# Altium PCB Board.PcbDoc (part 1 of 2)
Units mm, origin at the board's own origin, x right, y up, seen from the top; angles counter-clockwise.
Board outline 370 x 200 mm, 2 copper layers (Top Layer, Bottom Layer); 313 components, 247 nets, 1088 pads, 8 vias.
Unrouted connection lines stored in the file: 699.
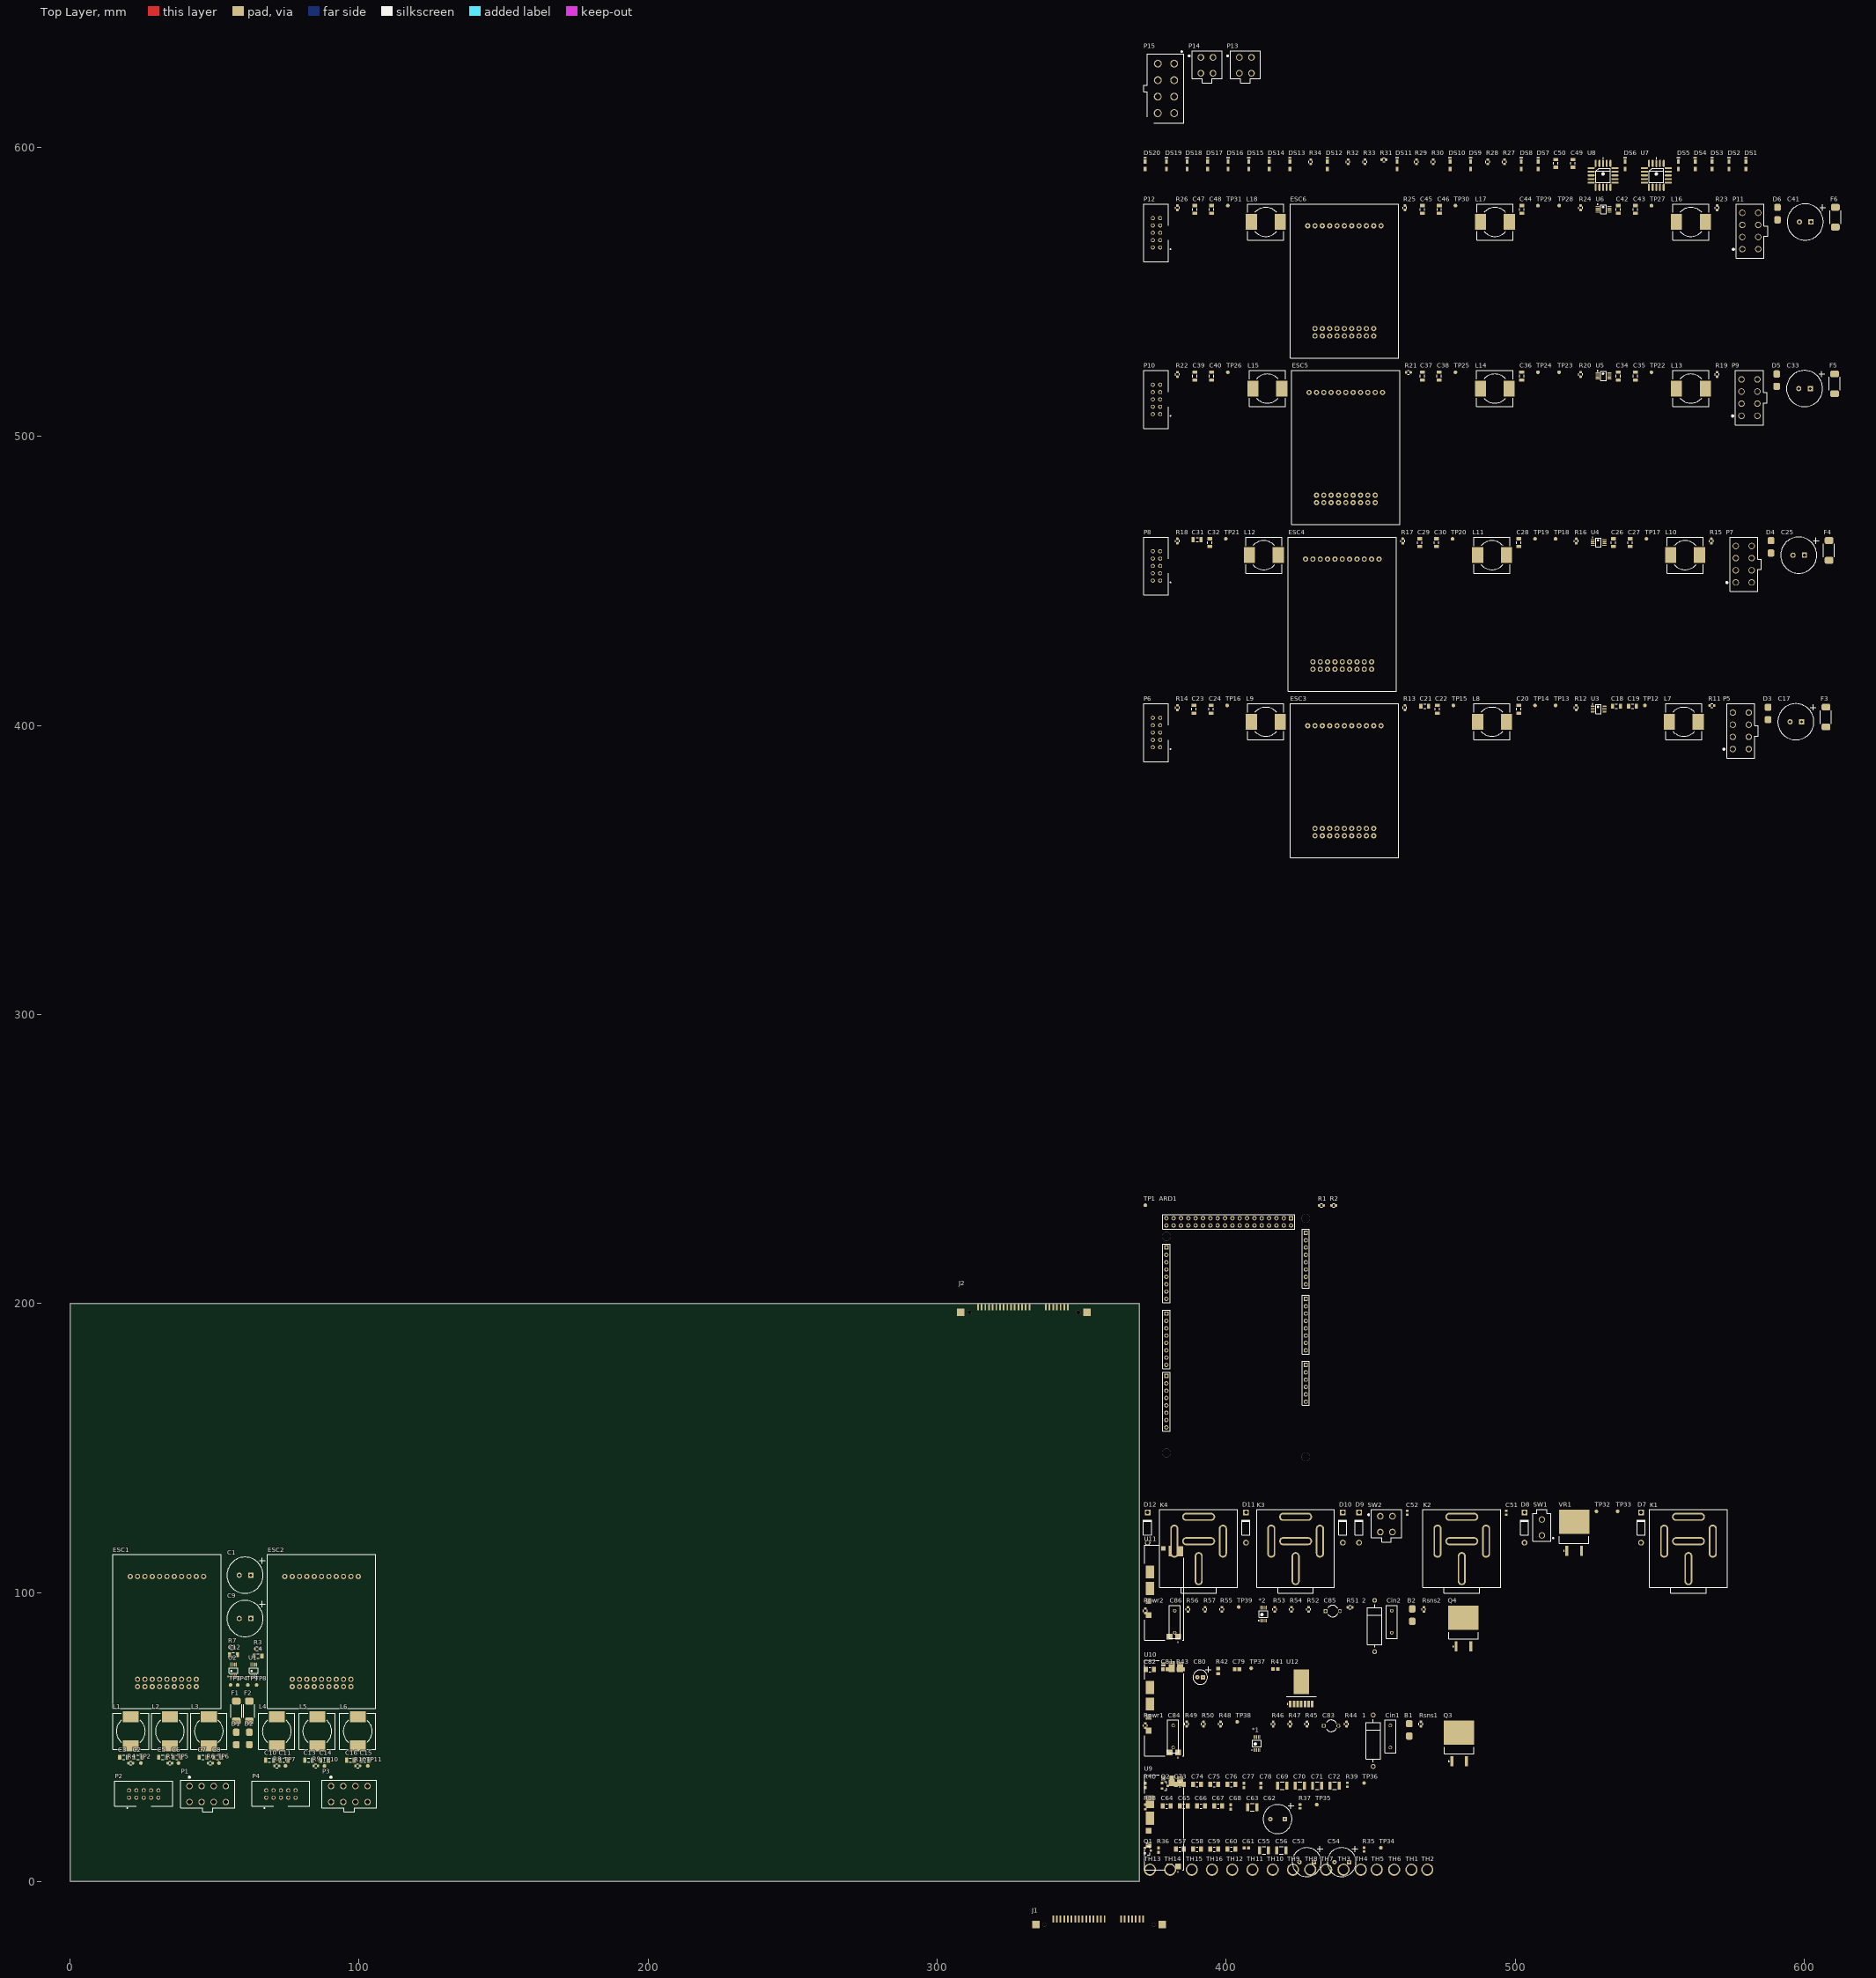
[diagram p0: Top Layer view]
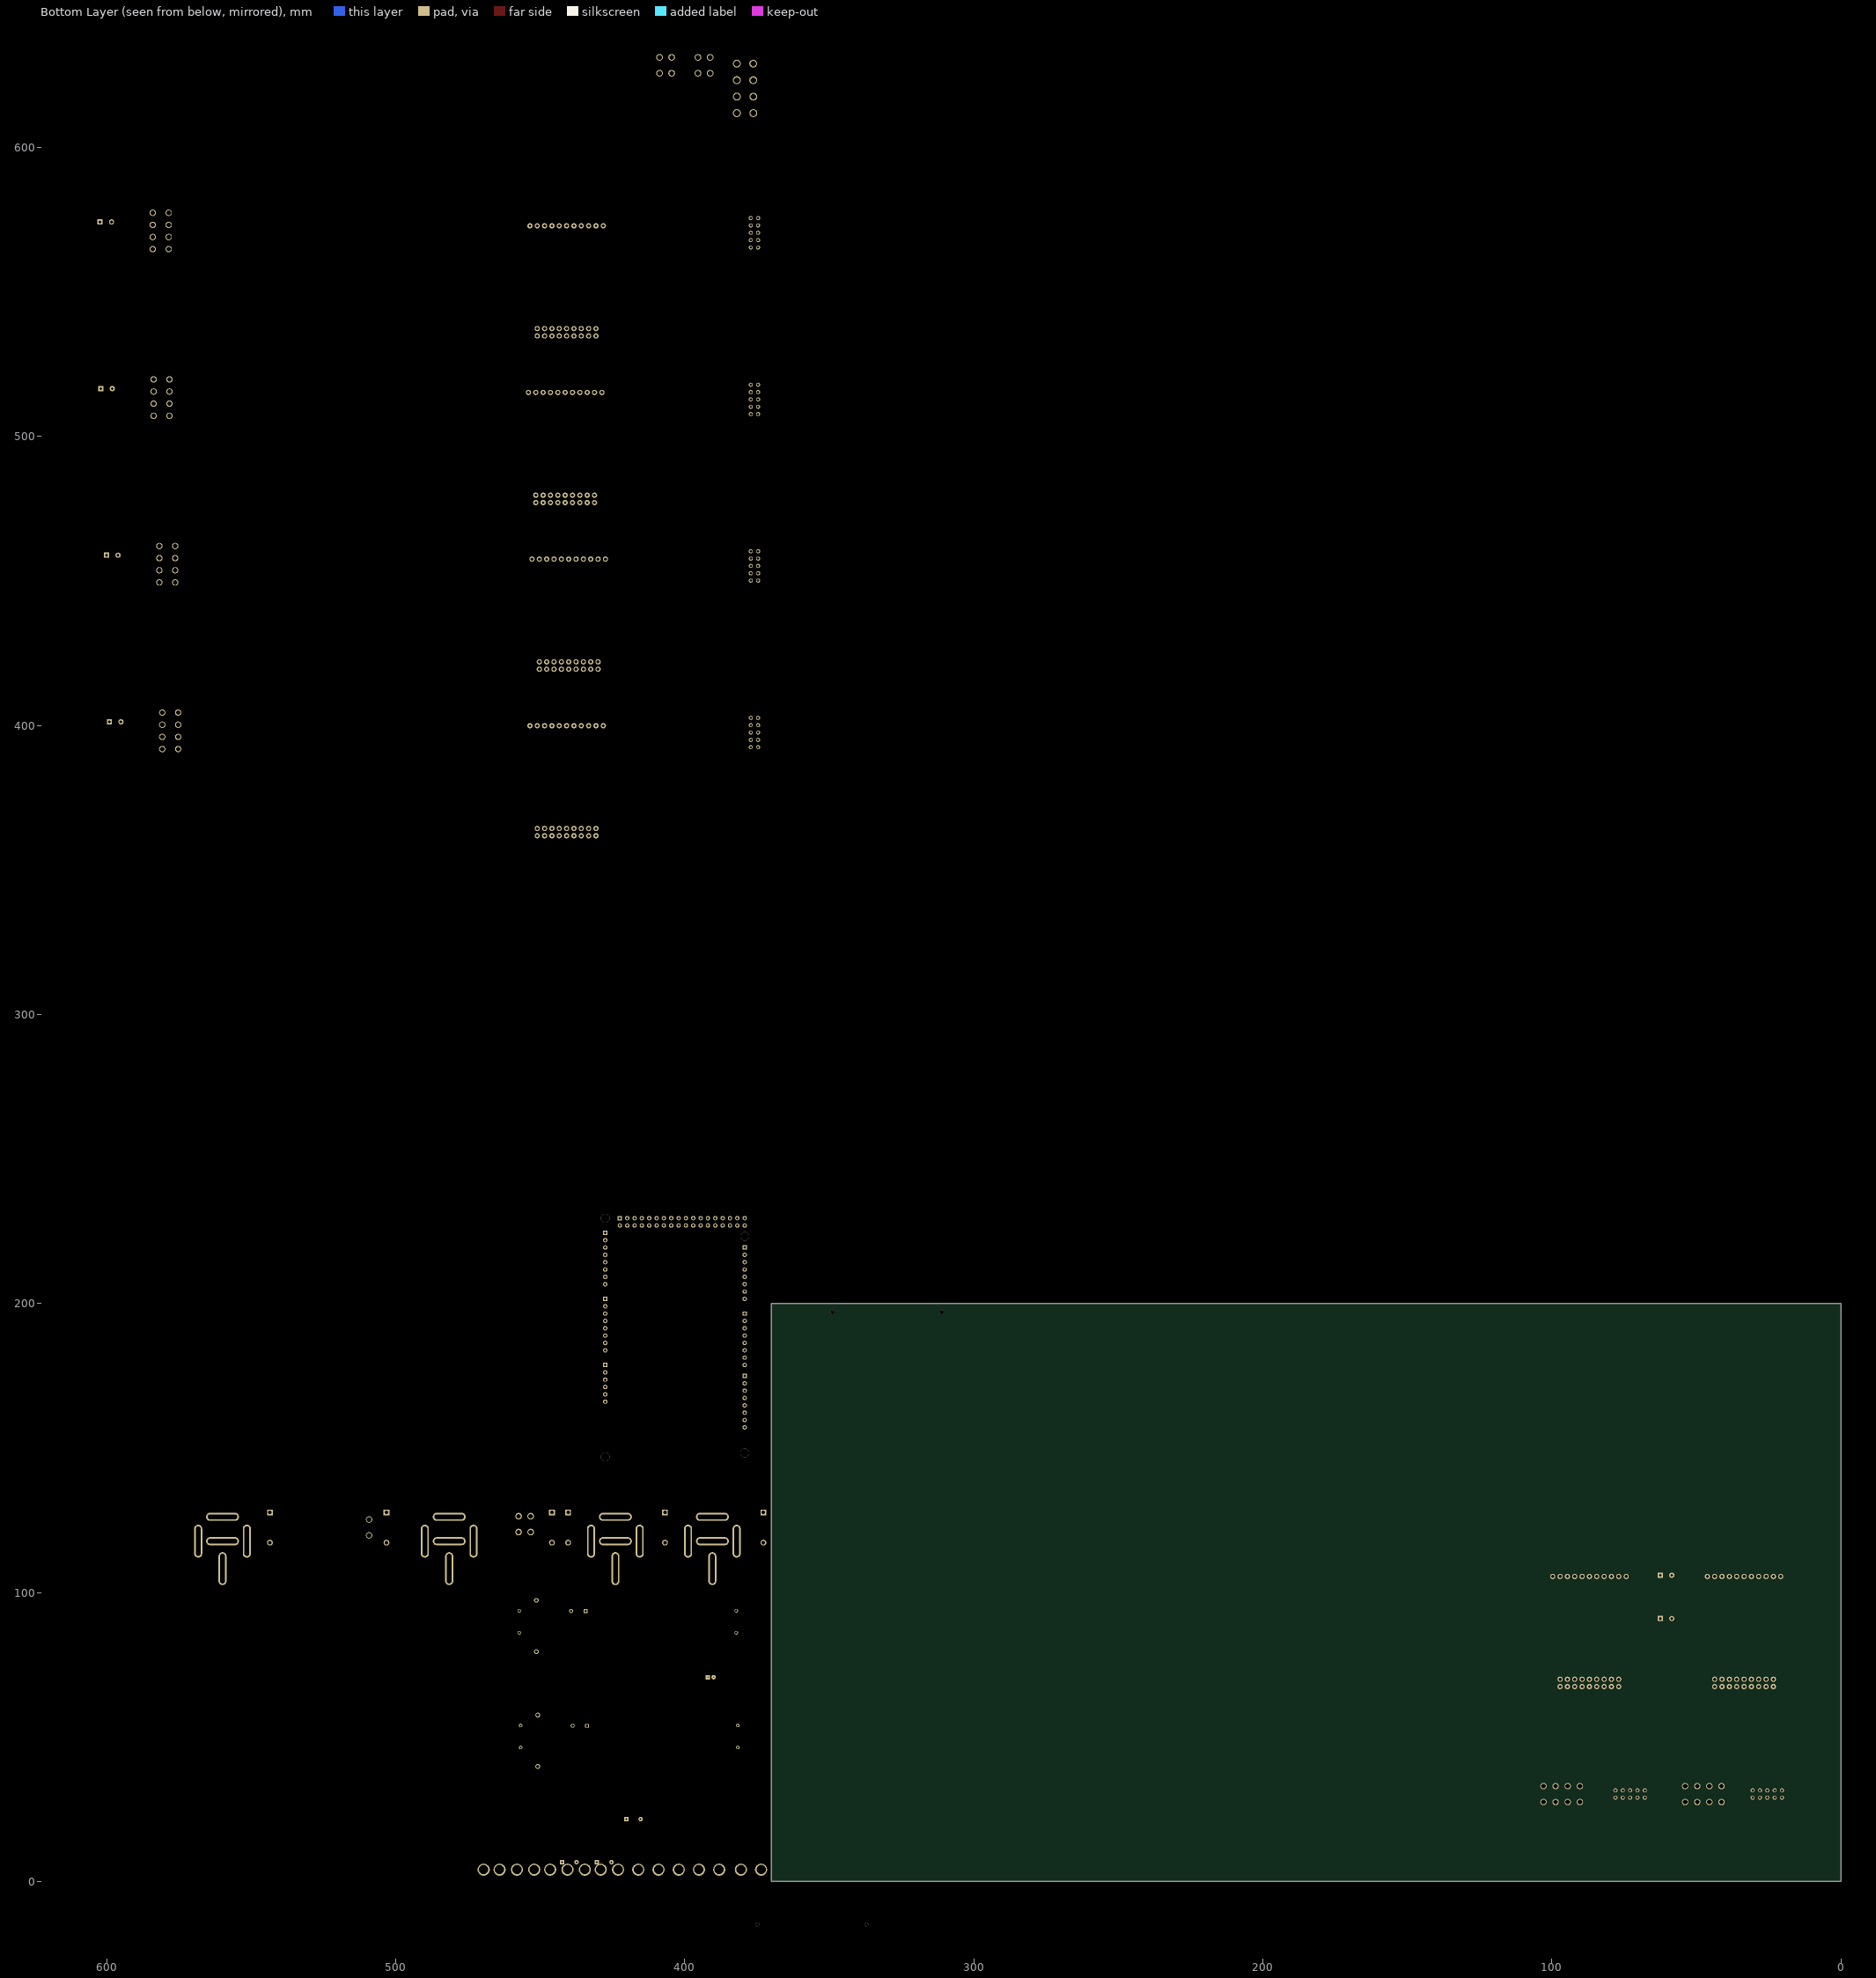
[diagram p1: Bottom Layer view, seen from below]

## Layer stack, top to bottom
Top Solder: solder mask 0.0102, Solder Resist, Dk 3.5
Top Layer: signal copper 0.0356
Dielectric 1: dielectric 0.32, FR-4, Dk 4.8
Bottom Layer: signal copper 0.0356
Bottom Solder: solder mask 0.0102, Solder Resist, Dk 3.5

## Board outline
0,0 370,0 370,200 0,200

## Design rules (kind name [scope] priority, off if disabled: settings)
Clearance [All] p1: gap=0.254 ignorepadtopadclearanceinfootprint=FALSE except(0: Arc-Hole Track-Hole SMDPad-Hole THPad-Hole Via-Hole Fill-Hole Poly-Hole Region-Hole Text-Hole)
PolygonConnect [All] p1: connectstyle=Relief reliefconductorwidth=0.254 reliefentries=4 polygonreliefangle="90 Angle" airgapwidth=0.254
RoomDefinition "SCH-10-Power Connectors" [InComponentClass('SCH-10-Power Connectors')] p1: confinementstyle=ConfineIn formatcopy=TRUE lockcomponents=FALSE outline 371.099,1.6 472.599,1.6 472.599,9.1 371.099,9.1
RoomDefinition "SCH-2-Main Controls" [InComponentClass('SCH-2-Main Controls')] p2: confinementstyle=ConfineIn formatcopy=TRUE lockcomponents=FALSE outline 371.12,132.758 438.899,132.758 438.899,237.413 371.12,237.413
RoomDefinition SCH-1-Relay_circuit [InComponentClass('SCH-1-Relay_circuit')] p3: confinementstyle=ConfineIn formatcopy=TRUE lockcomponents=FALSE outline 371.145,99.606 573.68,99.606 573.68,131.508 371.145,131.508
RoomDefinition 37V_efuse [InComponentClass('37V_efuse')] p4: confinementstyle=ConfineIn formatcopy=TRUE lockcomponents=FALSE outline 371.145,78.455 487.851,78.455 487.851,98.356 371.145,98.356
RoomDefinition 24V_board [InComponentClass('24V_board')] p5: confinementstyle=ConfineIn formatcopy=TRUE lockcomponents=FALSE outline 371.12,59.954 431.523,59.954 431.523,77.205 371.12,77.205
RoomDefinition 18V5_efuse [InComponentClass('18V5_efuse')] p6: confinementstyle=ConfineIn formatcopy=TRUE lockcomponents=FALSE outline 371.145,38.753 486.351,38.753 486.351,58.679 371.145,58.679
RoomDefinition 12V_board [InComponentClass('12V_board')] p7: confinementstyle=ConfineIn formatcopy=TRUE lockcomponents=FALSE outline 371.12,31.278 453.199,31.278 453.199,37.503 371.12,37.503
RoomDefinition 5V_board [InComponentClass('5V_board')] p8: confinementstyle=ConfineIn formatcopy=TRUE lockcomponents=FALSE outline 371.12,16.327 436.824,16.327 436.824,30.003 371.12,30.003
RoomDefinition 3V3_board [InComponentClass('3V3_board')] p9: confinementstyle=ConfineIn formatcopy=TRUE lockcomponents=FALSE outline 371.12,1.426 459,1.426 459,15.077 371.12,15.077
RoomDefinition "SCH-11-Out Going Connectors" [InComponentClass('SCH-11-Out Going Connectors')] p10: confinementstyle=ConfineIn formatcopy=TRUE lockcomponents=FALSE outline 371.145,608.331 412.172,608.331 412.172,636.307 371.145,636.307
RoomDefinition "SCH-9-Battery Voltage Indicators" [InComponentClass('SCH-9-Battery Voltage Indicators')] p11: confinementstyle=ConfineIn formatcopy=TRUE lockcomponents=FALSE outline 371.12,584.58 583.306,584.58 583.306,599.255 371.12,599.255
RoomDefinition SCH-4-ESC2 [InComponentClass('SCH-4-ESC2')] p12: confinementstyle=ConfineIn formatcopy=TRUE lockcomponents=FALSE outline 52.5,19.5 109.5,19.5 109.5,121 52.5,121
RoomDefinition SCH-3-ESC1 [InComponentClass('SCH-3-ESC1')] p13: confinementstyle=ConfineIn formatcopy=TRUE lockcomponents=FALSE outline 12.5,19.325 68.5,19.325 68.5,121.025 12.5,121.025
RoomDefinition SCH-8-ESC6 [InComponentClass('SCH-8-ESC6')] p14: confinementstyle=ConfineIn formatcopy=TRUE lockcomponents=FALSE outline 371.145,526.927 612.957,526.927 612.957,583.33 371.145,583.33
RoomDefinition SCH-7-ESC5 [InComponentClass('SCH-7-ESC5')] p15: confinementstyle=ConfineIn formatcopy=TRUE lockcomponents=FALSE outline 371.145,469.274 612.707,469.274 612.707,525.677 371.145,525.677
RoomDefinition SCH-6-ESC4 [InComponentClass('SCH-6-ESC4')] p16: confinementstyle=ConfineIn formatcopy=TRUE lockcomponents=FALSE outline 371.145,411.621 610.732,411.621 610.732,468.024 371.145,468.024
RoomDefinition SCH-5-ESC3 [InComponentClass('SCH-5-ESC3')] p17: confinementstyle=ConfineIn formatcopy=TRUE lockcomponents=FALSE outline 371.145,353.969 609.707,353.969 609.707,410.371 371.145,410.371
RoutingVias [All] p1: holewidth=0.711 width=1.27 viastyle="Through Hole" minholewidth=0.711 minwidth=1.27 maxholewidth=0.711 maxwidth=1.27
SolderMaskExpansion [All] p1: expansion=0.102 istentingtop=FALSE
Width [All] p1: maxlimit=0.254 minlimit=0.254 preferedwidth=0.254
30 further rules are at their usual default settings.

## Classes and differential pairs
component class "SCH-11-Out Going Connectors": J1 J2
component class SCH-8-ESC6: C41 C42 C43 C44 C45 C46 C47 C48 D6 ESC6 F6 L16 L17 L18 P11 P12 R23 R24 R25 R26 TP27 TP28 TP29 TP30 TP31 U6
component class SCH-7-ESC5: C33 C34 C35 C36 C37 C38 C39 C40 D5 ESC5 F5 L13 L14 L15 P9 P10 R19 R20 R21 R22 TP22 TP23 TP24 TP25 TP26 U5
component class SCH-6-ESC4: C25 C26 C27 C28 C29 C30 C31 C32 D4 ESC4 F4 L10 L11 L12 P7 P8 R15 R16 R17 R18 TP17 TP18 TP19 TP20 TP21 U4
component class SCH-5-ESC3: C17 C18 C19 C20 C21 C22 C23 C24 D3 ESC3 F3 L7 L8 L9 P5 P6 R11 R12 R13 R14 TP12 TP13 TP14 TP15 TP16 U3
component class SCH-4-ESC2: C9 C10 C11 C12 C13 C14 C15 C16 D2 ESC2 F2 L4 L5 L6 P3 P4 R7 R8 R9 R10 TP7 TP8 TP9 TP10 TP11 U2
component class SCH-3-ESC1: C1 C2 C3 C4 C5 C6 C7 C8 D1 ESC1 F1 L1 L2 L3 P1 P2 R3 R4 R5 R6 TP2 TP3 TP4 TP5 TP6 U1

## Components (designator, comment, footprint, x,y, rotation, side; value= is the part's Value field where it differs from the comment)
1 "D Zener" DIODE-0.7 450.874,48.704 r90 top
2 "D Zener" DIODE-0.7 451.374,88.406 r90 top
*1 "LM5069MM-2/NOPB" TSSOP50P490X110-10N 410.6,47.725 r90 top
*2 "LM5069MM-2/NOPB" TSSOP50P490X110-10N 412.897,92.506 r90 top
ARD1 "Arduino Mega" "Arduino Mega" 402.147,186.36 r90 top
B1 "TVS_DIODE" SMBJ54A-13-F 463.35,52.479 r90 top
B2 "TVS_DIODE" SMBJ54A-13-F 464.375,92.181 r90 top
C1 "Panasonic EEU-FC1J221S" "Panasonic EEU-FC1J221S" 60.5,106 r0 top value=220uF
C2 "Cap Semi" C1206 23.5,43 r180 top value=100pF
C3 "Cap Semi" C1206 18.5,43 r0 top value=100pF
C4 "Cap Semi" C1206 65,78 r180 top value=100pF
C5 "Cap Semi" C1206 32,43 r0 top value=100pF
C6 "Cap Semi" C1206 37,43 r180 top value=100pF
C7 "Cap Semi" C1206 46,43 r0 top value=100pF
C8 "Cap Semi" C1206 51,43 r180 top value=100pF
C9 "Panasonic EEU-FC1J221S" "Panasonic EEU-FC1J221S" 60.5,91 r0 top value=220uF
C10 "Cap Semi" C1206 69,42 r0 top value=100pF
C11 "Cap Semi" C1206 74,42 r180 top value=100pF
C12 "Cap Semi" C1206 56.5,78.5 r180 top value=100pF
C13 "Cap Semi" C1206 82.5,42 r0 top value=100pF
C14 "Cap Semi" C1206 88,42 r180 top value=100pF
C15 "Cap Semi" C1206 102,42 r180 top value=100pF
C16 "Cap Semi" C1206 97,42 r0 top value=100pF
C17 "Panasonic EEU-FC1J221S" "Panasonic EEU-FC1J221S" 597.106,401.296 r0 top value=220uF
C18 "Cap Semi" C1206 535.028,406.696 r0 top value=100pF
C19 "Cap Semi" C1206 540.604,406.696 r0 top value=100pF
C20 "Cap Semi" C1206 501.302,405.646 r90 top value=100pF
C21 "Cap Semi" C1206 468.7,406.696 r0 top value=100pF
C22 "Cap Semi" C1206 473.025,405.646 r90 top value=100pF
C23 "Cap Semi" C1206 388.896,405.646 r90 top value=100pF
C24 "Cap Semi" C1206 394.746,405.646 r90 top value=100pF
C25 "Panasonic EEU-FC1J221S" "Panasonic EEU-FC1J221S" 598.106,458.949 r0 top value=220uF
C26 "Cap Semi" C1206 533.978,463.299 r90 top value=100pF
C27 "Cap Semi" C1206 539.829,463.299 r90 top value=100pF
C28 "Cap Semi" C1206 501.302,463.299 r90 top value=100pF
C29 "Cap Semi" C1206 466.925,463.299 r90 top value=100pF
C30 "Cap Semi" C1206 472.75,463.299 r90 top value=100pF
C31 "Cap Semi" C1206 389.946,464.324 r0 top value=100pF
C32 "Cap Semi" C1206 394.271,463.299 r90 top value=100pF
C33 "Panasonic EEU-FC1J221S" "Panasonic EEU-FC1J221S" 600.106,516.601 r0 top value=220uF
C34 "Cap Semi" C1206 535.703,520.927 r90 top value=100pF
C35 "Cap Semi" C1206 541.554,520.927 r90 top value=100pF
C36 "Cap Semi" C1206 502.252,520.927 r90 top value=100pF
C37 "Cap Semi" C1206 467.9,520.927 r90 top value=100pF
C38 "Cap Semi" C1206 473.725,520.927 r90 top value=100pF
C39 "Cap Semi" C1206 389.146,520.927 r90 top value=100pF
C40 "Cap Semi" C1206 394.996,520.927 r90 top value=100pF
C41 "Panasonic EEU-FC1J221S" "Panasonic EEU-FC1J221S" 600.357,574.254 r0 top value=220uF
C42 "Cap Semi" C1206 535.728,578.579 r90 top value=100pF
C43 "Cap Semi" C1206 541.554,578.579 r90 top value=100pF
C44 "Cap Semi" C1206 502.277,578.579 r90 top value=100pF
C45 "Cap Semi" C1206 467.9,578.579 r90 top value=100pF
C46 "Cap Semi" C1206 473.75,578.579 r90 top value=100pF
C47 "Cap Semi" C1206 389.146,578.579 r90 top value=100pF
C48 "Cap Semi" C1206 394.996,578.579 r90 top value=100pF
C49 "Cap Semi" C1206 519.928,594.53 r90 top value=100pF
C50 "Cap Semi" C1206 514.077,594.53 r90 top value=100pF
C51 "Cap" 1608[0603] 496.976,127.557 r90 top value=100nF
C52 "Cap" 1608[0603] 462.675,127.557 r90 top value=22uF
C53 "330uF" "330uF throught hole" 427.873,6.702 r0 top
C54 "330uF" "330uF throught hole" 439.974,6.702 r0 top
C55 "22uF" "22uF Capacitor" 413.072,10.777 r0 top
C56 "22uF" "22uF Capacitor" 419.098,10.777 r0 top
C57 "10uf" "10uF capacitor LPB" 384.021,11.202 r0 top
C58 "10uf" "10uF capacitor LPB" 389.946,11.202 r0 top
C59 "10uf" "10uF capacitor LPB" 395.847,11.202 r0 top
C60 "10uf" "10uF capacitor LPB" 401.772,11.202 r0 top
C61 "0.01uF" "0.01uF capacitor" 406.922,11.627 r0 top
C62 "330uF" "330uF throught hole" 417.798,21.602 r0 top
C63 "22uF" "22uF Capacitor" 409.022,25.702 r0 top
C64 "10uf" "10uF capacitor LPB" 379.446,26.128 r0 top
C65 "10uf" "10uF capacitor LPB" 385.371,26.128 r0 top
C66 "10uf" "10uF capacitor LPB" 391.296,26.128 r0 top
C67 "10uf" "10uF capacitor LPB" 397.222,26.128 r0 top
C68 "0.01uF" "0.01uF capacitor" 401.572,25.777 r90 top
C69 "22uF" "22uF Capacitor" 419.423,33.203 r0 top
C70 "22uF" "22uF Capacitor" 425.448,33.203 r0 top
C71 "22uF" "22uF Capacitor" 431.473,33.203 r0 top
C72 "22uF" "22uF Capacitor" 437.499,33.203 r0 top
C73 "10uf" "10uF capacitor LPB" 384.021,33.628 r0 top
C74 "10uf" "10uF capacitor LPB" 389.946,33.628 r0 top
C75 "10uf" "10uF capacitor LPB" 395.847,33.628 r0 top
C76 "10uf" "10uF capacitor LPB" 401.772,33.628 r0 top
C77 "0.01uF" "0.01uF capacitor" 406.147,33.278 r90 top
C78 "0.01uF" "0.01uF capacitor" 411.997,33.278 r90 top
C79 "0.022uF" "0.022uF Ceramic" 403.772,73.48 r0 top
C80 "33uF" "33uF Through hole Radical" 391.021,70.705 r0 top
C81 "4700 pF" "4700uF 0805" 378.921,73.48 r0 top
C82 "10uf" "10uF capacitor LPB" 373.595,73.33 r0 top
C83 "Cap2" CAPR5-4X5 436.324,53.879 r0 top value=100pF
C84 "Cap" RAD-0.3 381.671,50.179 r90 top value=220nF
C85 "Cap2" CAPR5-4X5 436.849,93.581 r0 top value=100pF
C86 "Cap" RAD-0.3 382.196,89.881 r90 top value=220nF
Cin1 "Cin" RAD-0.3 456.8,50.179 r90 top value=100pF
Cin2 "Cin" RAD-0.3 457.3,89.881 r90 top value=100pF
D1 "TVS_DIODE" SMBJ54A-13-F 57.5,49.5 r270 top
D2 "TVS_DIODE" SMBJ54A-13-F 62,49.5 r270 top
D3 "TVS_DIODE" SMBJ54A-13-F 587.481,404.196 r90 top
D4 "TVS_DIODE" SMBJ54A-13-F 588.506,461.849 r90 top
D5 "TVS_DIODE" SMBJ54A-13-F 590.481,519.502 r90 top
D6 "TVS_DIODE" SMBJ54A-13-F 590.756,577.129 r90 top
D7 "Diode 1N4001" DO-41 543.554,122.482 r90 top
D8 "Diode 1N4001" DO-41 503.227,122.482 r90 top
D9 "Diode 1N4001" DO-41 445.974,122.482 r90 top
D10 "Diode 1N4001" DO-41 440.374,122.482 r90 top
D11 "Diode 1N4001" DO-41 406.847,122.482 r90 top
D12 "Diode 1N4001" DO-41 372.795,122.482 r90 top
DS1 "LTST-S220KGKT" LTST-S220KGKT_V 579.806,593.88 r90 top
DS2 "LTST-S220KGKT" LTST-S220KGKT_V 573.98,593.88 r90 top
DS3 "LTST-S220KGKT" LTST-S220KGKT_V 568.13,593.88 r90 top
DS4 "LTST-S220KGKT" LTST-S220KGKT_V 562.28,593.88 r90 top
DS5 "LTST-S220KGKT" LTST-S220KGKT_V 556.454,593.88 r90 top
DS6 "LTST-S220KGKT" LTST-S220KGKT_V 538.028,593.88 r90 top
DS7 "LTST-S220KGKT" LTST-S220KGKT_V 507.927,593.88 r90 top
DS8 "LTST-S220KGKT" LTST-S220KGKT_V 502.102,593.88 r90 top
DS9 "LTST-S220KGKT" LTST-S220KGKT_V 484.551,593.88 r90 top
DS10 "LTST-S220KGKT" LTST-S220KGKT_V 477.451,593.88 r90 top
DS11 "LTST-S220KGKT" LTST-S220KGKT_V 459.125,593.88 r90 top
DS12 "LTST-S220KGKT" LTST-S220KGKT_V 434.973,593.88 r90 top
DS13 "LTST-S220KGKT" LTST-S220KGKT_V 422.023,593.88 r90 top
DS14 "LTST-S220KGKT" LTST-S220KGKT_V 414.897,593.88 r90 top
DS15 "LTST-S220KGKT" LTST-S220KGKT_V 407.797,593.88 r90 top
DS16 "LTST-S220KGKT" LTST-S220KGKT_V 400.672,593.88 r90 top
DS17 "LTST-S220KGKT" LTST-S220KGKT_V 393.571,593.88 r90 top
DS18 "LTST-S220KGKT" LTST-S220KGKT_V 386.471,593.88 r90 top
DS19 "LTST-S220KGKT" LTST-S220KGKT_V 379.346,593.88 r90 top
DS20 "LTST-S220KGKT" LTST-S220KGKT_V 371.97,593.88 r90 top
ESC1 "ESCON 50/8 HE" "ESCON 50/8 HE" 33.5,86.5 r90 top
ESC2 "ESCON 50/8 HE" "ESCON 50/8 HE" 87,86.5 r90 top
ESC3 "ESCON 50/8 HE" "ESCON 50/8 HE" 440.899,380.895 r90 top
ESC4 "ESCON 50/8 HE" "ESCON 50/8 HE" 440.174,438.548 r90 top
ESC5 "ESCON 50/8 HE" "ESCON 50/8 HE" 441.399,496.2 r90 top
ESC6 "ESCON 50/8 HE" "ESCON 50/8 HE" 440.899,553.853 r90 top
F1 "Fuse 2" 0157010.DR 57.5,59 r90 top
F2 "Fuse 2" 0157010.DR 62,59 r90 top
F3 "Fuse 2" 0157010.DR 607.532,402.946 r90 top
F4 "Fuse 2" 0157010.DR 608.557,460.599 r90 top
F5 "Fuse 2" 0157010.DR 610.532,518.252 r90 top
F6 "Fuse 2" 0157010.DR 610.782,575.904 r90 top
J1 "SATA 1" "SATA Female" 356.03,-14.825 r0 top
J2 "SATA 2" "SATA Female" 330,197 r0 top
K1 "Relay" "Relay RC-700112-NN" 559.955,115.232 r0 top
K2 "Relay" "Relay RC-700112-NN" 481.526,115.232 r0 top
K3 "Relay" "Relay RC-700112-NN" 424.023,115.232 r0 top
K4 "Relay" "Relay RC-700112-NN" 390.471,115.232 r0 top
L1 "DR127-4R7-R" DR127-4R7-R 21,52 r270 top value=4.7uH
L2 "DR127-4R7-R" DR127-4R7-R 34.5,52 r270 top value=4.7uH
L3 "DR127-4R7-R" DR127-4R7-R 48,52 r270 top value=4.7uH
L4 "DR127-4R7-R" DR127-4R7-R 71.5,52 r270 top value=4.7uH
L5 "DR127-4R7-R" DR127-4R7-R 85.5,52 r270 top value=4.7uH
L6 "DR127-4R7-R" DR127-4R7-R 99.5,52 r270 top value=4.7uH
L7 "DR127-4R7-R" DR127-4R7-R 558.304,401.296 r0 top value=4.7uH
L8 "DR127-4R7-R" DR127-4R7-R 492.001,401.296 r0 top value=4.7uH
L9 "DR127-4R7-R" DR127-4R7-R 413.722,401.296 r0 top value=4.7uH
L10 "DR127-4R7-R" DR127-4R7-R 558.779,458.949 r0 top value=4.7uH
L11 "DR127-4R7-R" DR127-4R7-R 492.001,458.949 r0 top value=4.7uH
L12 "DR127-4R7-R" DR127-4R7-R 412.997,458.949 r0 top value=4.7uH
L13 "DR127-4R7-R" DR127-4R7-R 560.78,516.601 r0 top value=4.7uH
L14 "DR127-4R7-R" DR127-4R7-R 492.951,516.601 r0 top value=4.7uH
L15 "DR127-4R7-R" DR127-4R7-R 414.222,516.601 r0 top value=4.7uH
L16 "DR127-4R7-R" DR127-4R7-R 560.78,574.254 r0 top value=4.7uH
L17 "DR127-4R7-R" DR127-4R7-R 492.976,574.254 r0 top value=4.7uH
L18 "DR127-4R7-R" DR127-4R7-R 413.722,574.254 r0 top value=4.7uH
P1 "0039281083" "Molex Mini-Fit Jr 0039281083" 47.6,30.25 r0 top
P2 "Header_10_Pos_Ribbon Male" 3M_2510-6002UB 25.46,30.27 r0 top
P3 "0039281083" "Molex Mini-Fit Jr 0039281083" 96.6,30.25 r0 top
P4 "Header_10_Pos_Ribbon Male" 3M_2510-6002UB 72.92,30.27 r0 top
P5 "0039281083" "Molex Mini-Fit Jr 0039281083" 578.055,398.171 r90 top
P6 "Header_10_Pos_Ribbon Male" 3M_2510-6002UB 375.896,397.571 r90 top
P7 "0039281083" "Molex Mini-Fit Jr 0039281083" 579.08,455.823 r90 top
P8 "Header_10_Pos_Ribbon Male" 3M_2510-6002UB 375.896,455.223 r90 top
P9 "0039281083" "Molex Mini-Fit Jr 0039281083" 581.056,513.476 r90 top
P10 "Header_10_Pos_Ribbon Male" 3M_2510-6002UB 375.896,512.851 r90 top
P11 "0039281083" "Molex Mini-Fit Jr 0039281083" 581.331,571.129 r90 top
P12 "Header_10_Pos_Ribbon Male" 3M_2510-6002UB 375.896,570.504 r90 top
P13 "Mini-Fit Jr 4 Pos" "MOLEX 0039281043" 404.547,631.207 r0 top
P14 "Mini-Fit Jr 4 Pos" "MOLEX 0039281043" 391.246,631.207 r0 top
P15 "Mini-Fit Jr 8 Pos RA" "MOLEX 172065-0208" 377.771,619.231 r90 top
Q1 "2N7002-7-F" FP-SOT23-MFG 372.92,10.702 r0 top
Q2 "2N7002-7-F" FP-SOT23-MFG 378.771,33.128 r0 top
Q3 "PSMN4R8-100BSEJ" DPAK254P1420X457-3N 480.601,47.704 r90 top
Q4 "PSMN4R8-100BSEJ" DPAK254P1420X457-3N 482.101,87.406 r90 top
R1 "Res1" RESC1608X06N_0603 432.973,233.963 r0 top value=10k
R2 "Res1" RESC1608X06N_0603 437.199,233.963 r0 top value=10k
R3 "Res1" RESC1608X06N_0603 64.725,80.5 r180 top value=1K
R4 "Res1" RESC1608X06N_0603 21,41 r0 top value=1K
R5 "Res1" RESC1608X06N_0603 34.5,41 r0 top value=1K
R6 "Res1" RESC1608X06N_0603 48.5,41 r0 top value=1K
R7 "Res1" RESC1608X06N_0603 56,81 r180 top value=1K
R8 "Res1" RESC1608X06N_0603 71.5,40 r0 top value=1K
R9 "Res1" RESC1608X06N_0603 85,40 r0 top value=1K
R10 "Res1" RESC1608X06N_0603 99.5,40 r180 top value=1K
R11 "Res1" RESC1608X06N_0603 568.08,406.921 r0 top value=1K
R12 "Res1" RESC1608X06N_0603 521.128,406.196 r90 top value=1K
R13 "Res1" RESC1608X06N_0603 461.825,406.196 r90 top value=1K
R14 "Res1" RESC1608X06N_0603 383.096,406.196 r90 top value=1K
R15 "Res1" RESC1608X06N_0603 567.88,463.849 r90 top value=1K
R16 "Res1" RESC1608X06N_0603 521.128,463.849 r90 top value=1K
R17 "Res1" RESC1608X06N_0603 461.1,463.849 r90 top value=1K
R18 "Res1" RESC1608X06N_0603 383.096,463.849 r90 top value=1K
R19 "Res1" RESC1608X06N_0603 569.855,521.502 r90 top value=1K
R20 "Res1" RESC1608X06N_0603 522.603,521.502 r90 top value=1K
R21 "Res1" RESC1608X06N_0603 463.05,522.202 r0 top value=1K
R22 "Res1" RESC1608X06N_0603 383.096,521.502 r90 top value=1K
R23 "Res1" RESC1608X06N_0603 569.88,579.155 r90 top value=1K
R24 "Res1" RESC1608X06N_0603 522.628,579.155 r90 top value=1K
R25 "Res1" RESC1608X06N_0603 461.825,579.155 r90 top value=1K
R26 "Res1" RESC1608X06N_0603 383.096,579.155 r90 top value=1K
R27 "Res1" RESC1608X06N_0603 496.326,595.08 r90 top value=1K
R28 "Res1" RESC1608X06N_0603 490.476,595.08 r90 top value=1K
R29 "Res1" RESC1608X06N_0603 465.825,595.08 r90 top value=1K
R30 "Res1" RESC1608X06N_0603 471.675,595.08 r90 top value=1K
R31 "Res1" RESC1608X06N_0603 454.574,595.805 r0 top value=1K
R32 "Res1" RESC1608X06N_0603 442.174,595.08 r90 top value=1K
R33 "Res1" RESC1608X06N_0603 448.024,595.08 r90 top value=1K
R34 "Res1" RESC1608X06N_0603 429.223,595.08 r90 top value=1K
R35 "CRCW06030000Z0EA" RESC1609X50X30NL8T20 447.724,11.052 r90 top
R36 "26.7KR" "26.7KR Resistor" 376.621,10.852 r90 top
R37 "CRCW06030000Z0EA" RESC1609X50X30NL8T20 425.548,25.978 r90 top
R38 "16.2 KOhm" "16.2 KOhm Resistor" 371.995,25.827 r90 top
R39 "CRCW06030000Z0EA" RESC1609X50X30NL8T20 441.899,33.478 r90 top
R40 "6.19 KOhm" "6.19KOhm Resistor" 372.045,33.278 r90 top
R41 "34KOhm" "34 KOhm Resistor ERA-6A" 416.998,73.53 r0 top
R42 "1.18 KOhm" "34 KOhm Resistor ERA-6A" 397.197,72.78 r90 top
R43 "499 KOhm" "499KOhm RG2012" 384.271,73.48 r0 top
R44 "RCL2" RESC1608X06N_0603 441.674,54.504 r90 top value=1K
R45 "RCL1" RESC1608X06N_0603 427.973,54.504 r90 top value=1K
R46 "R1" RESC1608X06N_0603 416.273,54.504 r90 top value=1K
R47 "R3" RESC1608X06N_0603 422.123,54.504 r90 top value=1K
R48 "R" RESC1608X06N_0603 398.022,54.504 r90 top value=1K
R49 "R2" RESC1608X06N_0603 386.321,54.504 r90 top value=1K
R50 "R4" RESC1608X06N_0603 392.171,54.504 r90 top value=1K
R51 "RCL2" RESC1608X06N_0603 442.874,94.906 r0 top value=1K
R52 "RCL1" RESC1608X06N_0603 428.498,94.181 r90 top value=1K
R53 "R1" RESC1608X06N_0603 416.773,94.181 r90 top value=1K
R54 "R3" RESC1608X06N_0603 422.623,94.181 r90 top value=1K
R55 "R" RESC1608X06N_0603 398.522,94.181 r90 top value=1K
R56 "R2" RESC1608X06N_0603 386.821,94.181 r90 top value=1K
R57 "R4" RESC1608X06N_0603 392.671,94.181 r90 top value=1K
Rpwr1 "Rpwr" RESC1608X06N_0603 372.07,53.979 r90 top value=1K
Rpwr2 "Rpwr" RESC1608X06N_0603 372.07,93.681 r90 top value=1K
Rsns1 "Rsns" RESC1608X06N_0603 467.375,54.504 r90 top value=1K
Rsns2 "Rsns" RESC1608X06N_0603 468.375,94.181 r90 top value=1K
SW1 "Key_Switch" MOLEX_0039293026 509.227,122.507 r90 top
SW2 "NO-NC ESD with light" "MOLEX 0039281043" 453.324,126.407 r0 top
TH1 "12AWG_TH" m3screw 464.099,4.1 r0 top
TH2 "12AWG_TH" m3screw 469.599,4.1 r0 top
TH3 "12AWG_TH" m3screw 440.599,4.1 r0 top
TH4 "12AWG_TH" m3screw 446.599,4.1 r0 top
TH5 "10AWG_TH" m3screw 452.099,4.1 r0 top
TH6 "10AWG_TH" m3screw 458.099,4.1 r0 top
TH7 "10AWG_TH" m3screw 434.599,4.1 r0 top
TH8 "10AWG_TH" m3screw 429.099,4.1 r0 top
TH9 "10AWG_TH" m3screw 423.099,4.1 r0 top
TH10 "10AWG_TH" m3screw 416.099,4.1 r0 top
TH11 "10AWG_TH" m3screw 409.099,4.1 r0 top
TH12 "10AWG_TH" m3screw 402.099,4.1 r0 top
TH13 "10AWG_TH" m3screw 373.599,4.1 r0 top
TH14 "10AWG_TH" m3screw 380.599,4.1 r0 top
TH15 "10AWG_TH" m3screw 388.099,4.1 r0 top
TH16 "10AWG_TH" m3screw 395.099,4.1 r0 top
TP1 "TestPt" 50_MIL_PAD 372.02,234.013 r90 top
TP2 "TestPt" 50_MIL_PAD 24.5,41 r90 top
TP3 "TestPt" 50_MIL_PAD 55.5,68 r90 top
TP4 "TestPt" 50_MIL_PAD 58,68 r90 top
TP5 "TestPt" 50_MIL_PAD 37.5,41 r90 top
TP6 "TestPt" 50_MIL_PAD 51.5,41 r90 top
TP7 "TestPt" 50_MIL_PAD 74.5,40 r90 top
TP8 "TestPt" 50_MIL_PAD 64.5,68 r90 top
TP9 "TestPt" 50_MIL_PAD 61.5,68 r90 top
TP10 "TestPt" 50_MIL_PAD 88,40 r90 top
TP11 "TestPt" 50_MIL_PAD 103,40 r90 top
TP12 "TestPt" 50_MIL_PAD 544.904,406.971 r90 top
TP13 "TestPt" 50_MIL_PAD 513.977,406.971 r90 top
TP14 "TestPt" 50_MIL_PAD 506.877,406.971 r90 top
TP15 "TestPt" 50_MIL_PAD 478.601,406.971 r90 top
TP16 "TestPt" 50_MIL_PAD 400.322,406.971 r90 top
TP17 "TestPt" 50_MIL_PAD 545.404,464.599 r90 top
TP18 "TestPt" 50_MIL_PAD 513.977,464.599 r90 top
TP19 "TestPt" 50_MIL_PAD 506.877,464.599 r90 top
TP20 "TestPt" 50_MIL_PAD 478.351,464.599 r90 top
TP21 "TestPt" 50_MIL_PAD 399.847,464.599 r90 top
TP22 "TestPt" 50_MIL_PAD 547.129,522.252 r90 top
TP23 "TestPt" 50_MIL_PAD 515.202,522.252 r90 top
TP24 "TestPt" 50_MIL_PAD 507.852,522.252 r90 top
TP25 "TestPt" 50_MIL_PAD 479.326,522.252 r90 top
TP26 "TestPt" 50_MIL_PAD 400.572,522.252 r90 top
TP27 "TestPt" 50_MIL_PAD 547.154,579.905 r90 top
TP28 "TestPt" 50_MIL_PAD 515.227,579.905 r90 top
TP29 "TestPt" 50_MIL_PAD 507.852,579.905 r90 top
TP30 "TestPt" 50_MIL_PAD 479.326,579.905 r90 top
TP31 "TestPt" 50_MIL_PAD 400.572,579.905 r90 top
TP32 "TestPt" 50_MIL_PAD 528.078,128.107 r90 top
TP33 "TestPt" 50_MIL_PAD 535.428,128.107 r90 top
TP34 "TestPt" 50_MIL_PAD 453.524,11.677 r90 top
TP35 "TestPt" 50_MIL_PAD 431.348,26.603 r90 top
TP36 "TestPt" 50_MIL_PAD 447.724,34.078 r90 top
TP37 "TestPt" 50_MIL_PAD 408.647,73.78 r90 top
TP38 "TestPt" 50_MIL_PAD 403.822,55.254 r90 top
TP39 "TestPt" 50_MIL_PAD 404.347,94.956 r90 top
U1 "DAC121C085" MUA08A_L 63.5,73 r90 top
U2 "DAC121C085" MUA08A_L 56.5,73 r90 top
U3 "DAC121C085" MUA08A_L 528.828,405.696 r0 top
U4 "DAC121C085" MUA08A_L 528.828,463.349 r0 top
U5 "DAC121C085" MUA08A_L 530.553,520.977 r0 top
U6 "DAC121C085" MUA08A_L 530.578,578.629 r0 top
U7 "LM3914VX/NOPB" PLCC127P990X990X457-20N 548.829,590.38 r0 top
U8 "LM3914VX/NOPB" PLCC127P990X990X457-20N 530.403,590.38 r0 top
U9 "APXW012A0X3-SRZ" APXW012A0X3SRZ 378.599,20.1 r90 top
U10 "APXW012A0X3-SRZ_1" APXW012A0X3SRZ 378.599,59.6 r90 top
U11 "APXW012A0X3-SRZ_1" APXW012A0X3SRZ 378.599,99.6 r90 top
U12 "LMZ14203HTZX/NOPB" NDW0007A_V 425.998,66.779 r90 top
VR1 "Volt Reg" DPAK254P1420X457-3N 520.428,120.557 r90 top

## Footprints (in the part's own frame and the unit in brackets; to place one, negate y for a bottom-side part, rotate by r counter-clockwise, add the part's x,y. Pads: shape width x height; smd on the part's side, far side on the other; paste and mask are expansions set on the pad)
"0.01uF capacitor" [mm] "Chip Capacitor, 2-Leads, Body 1,60x0,80mm, IPC Medium Density"
  rect 1.05x1 smd: 1(-0.75,0) 2(0.75,0)
  body extent -0.88,-0.48 0.87,0.47, height 0.87
"0.022uF Ceramic" [mm] "Chip Capacitor, 2-Leads, Body 2,00x1,25mm, IPC Medium Density"
  rect 1.3x1.45 smd: 1(-0.8,0) 2(0.8,0)
  body extent -1.1,-0.72 1.1,0.72, height 0.88
3M_2510-6002UB [mm] "Connector Header Through Hole 10 position 0.100\" (2.54mm)"
  round 1.4 hole 0.889: 1(-5.08,-1.27) 2(-5.08,1.27) 3(-2.54,-1.27) 4(-2.54,1.27) 5(0,-1.27) 6(0,1.27) 7(2.54,-1.27) 8(2.54,1.27) 9(5.08,-1.27) 10(5.08,1.27)
  silkscreen extent -10.01,-4.89 9.98,4.47, body extent -10.01,-4.17 10.01,4.47, height 9.4
"6.19KOhm Resistor" [mm] "Chip Resistor, 2-Leads, Body 1,60x0,80mm, IPC Medium Density"
  rect 1.05x1 smd: 1(-0.725,0) 2(0.725,0)
  body extent -0.9,-0.5 0.9,0.5, height 0.55
"10uF capacitor LPB" [mm] "Chip Capacitor, 2-Leads, Body 3,20x1,60mm, IPC Medium Density"
  rect 1.35x1.8 smd: 1(-1.375,0) 2(1.375,0)
  silkscreen extent -0.3,-0.8 0.3,0.8, body extent -1.7,-0.9 1.7,0.9, height 1.8
"16.2 KOhm Resistor" [mm] "Chip Resistor, 2-Leads, Body 1,60x0,80mm, IPC Medium Density"
  rect 0.85x0.9 smd: 1(-0.775,0) 2(0.775,0)
  body extent -0.85,-0.45 0.85,0.45, height 0.55
"22uF Capacitor" [mm] "Chip Capacitor, 2-Leads, Body 3,20x2,50mm, IPC Medium Density"
  rect 1.05x2.7 smd: 1(-1.575,0) 2(1.575,0)
  silkscreen extent -0.65,-1.25 0.65,1.25, body extent -1.75,-1.35 1.75,1.35, height 2.7
"26.7KR Resistor" [mm] "Chip Resistor, 2-Leads, Body 1,60x0,80mm, IPC Medium Density"
  rect 1.05x1 smd: 1(-0.725,0) 2(0.725,0)
  body extent -0.9,-0.5 0.9,0.5, height 0.55
"33uF Through hole Radical" [mm]
  rect 1.524x1.524 hole 0.5: 1(1,0)
  round 1.524 hole 0.5: 2(-1,0)
  silkscreen extent -2.5,-2.5 3.79,3.67
"34 KOhm Resistor ERA-6A" [mm] "Chip Resistor, 2-Leads, Body 2,00x1,25mm, IPC Medium Density"
  rect 1.2x1.35 smd: 1(-0.85,0) 2(0.85,0)
  body extent -1.1,-0.67 1.1,0.67, height 0.6
50_MIL_PAD [mm]
  round 1.27 smd: 1(0,0)
"330uF throught hole" [mm]
  rect 1.524x1.524 hole 0.6: 1(2.5,0)
  round 1.524 hole 0.6: 2(-2.5,0)
  silkscreen extent -5,-5 5.57,5.57
"499KOhm RG2012" [mm] "Chip Resistor, 2-Leads, Body 2,00x1,25mm, IPC Medium Density"
  rect 1.15x1.45 smd: 1(-0.875,0) 2(0.875,0)
  body extent -1.1,-0.72 1.1,0.72, height 0.5
1608[0603] [mm] "Chip Capacitor, Body 1.6x0.8mm, IPC High Density"
  rect 0.8x0.9 smd: 1(-0.7,0) 2(0.7,0)
  body extent -0.87,-0.48 0.87,0.48, height 1.3
"4700uF 0805" [mm] "Chip Capacitor, 2-Leads, Body 2,00x1,25mm, IPC Medium Density"
  rect 1.3x1.45 smd: 1(-0.8,0) 2(0.8,0)
  body extent -1.1,-0.72 1.1,0.72, height 0.88
0157010.DR [mm]
  rrect50% 2.4x3 smd: 1(3.43,0) 2(-3.43,0)
  silkscreen extent -2.29,-1.91 2.29,1.91, body extent -3.29,-1.84 3.29,1.84, height 3.9
APXW012A0X3SRZ [mm]
  rect 2.03x2.03 smd: 1(-14.89,-4.82) 7(-2.57,5.46) 8(-7.4,5.46) 9(-14.89,-1.78)
  rect 3.43x2.16 smd: 2(14.64,-5.4)
  rect 3.68x2.03 smd: 3(14.78,-2.54)
  rect 1.52x1.52 smd: 4(15.59,0.26)
  rect 4.45x2.92 smd: 5(7.53,5.02) 6(1.81,5.02)
  silkscreen extent -16.86,-6.73 16.86,6.73, body extent -16.16,-6.73 16.86,6.73, height 10.1
"Arduino Mega" [mm] "Arduino Mega 2560"
  rect 1.5x1.5 hole 0.9: 0(10.16,22.86) 8(-11.43,22.86) 21(33.02,22.86) 59(-7.62,-25.4) 67(15.24,-25.4) 75(38.1,-25.4) 79(43.18,-20.32)
  round 1.5 hole 0.9: 1(7.62,22.86) 2(5.08,22.86) 3(2.54,22.86) 4(0,22.86) 5(-2.54,22.86) 6(-5.08,22.86) 7(-7.62,22.86) 9(-13.97,22.86) 10(-16.51,22.86) 11(-19.05,22.86) 12(-21.59,22.86) 13(-24.13,22.86) 14(15.24,22.86) 15(17.78,22.86) 16(20.32,22.86) 17(22.86,22.86) 18(25.4,22.86) 19(27.94,22.86) 20(30.48,22.86) 22(40.64,20.32) 23(43.18,20.32) 24(40.64,17.78) 25(43.18,17.78) 26(40.64,15.24) 27(43.18,15.24) 28(40.64,12.7) 29(43.18,12.7) 30(40.64,10.16) 31(43.18,10.16) 32(40.64,7.62) 33(43.18,7.62) 34(40.64,5.08) 35(43.18,5.08) 36(40.64,2.54) 37(43.18,2.54) 38(40.64,0) 39(43.18,0) 40(40.64,-2.54) 41(43.18,-2.54) 42(40.64,-5.08) 43(43.18,-5.08) 44(40.64,-7.62) 45(43.18,-7.62) 46(40.64,-10.16) 47(43.18,-10.16) 48(40.64,-12.7) 49(43.18,-12.7) 50(40.64,-15.24) 51(43.18,-15.24) 52(40.64,-17.78) 53(43.18,-17.78) 54(-20.32,-25.4) 55(-17.78,-25.4) 56(-15.24,-25.4) 57(-12.7,-25.4) 58(-10.16,-25.4) 60(-2.54,-25.4) 61(0,-25.4) 62(2.54,-25.4) 63(5.08,-25.4) 64(7.62,-25.4) 65(10.16,-25.4) 66(12.7,-25.4) 68(20.32,-25.4) 69(22.86,-25.4) 70(25.4,-25.4) 71(27.94,-25.4) 72(30.48,-25.4) 73(33.02,-25.4) 74(35.56,-25.4) 76(-26.67,22.86) 77(-29.21,22.86) 78(40.64,-20.32) 80(43.18,22.86) 81(40.64,22.86)
  silkscreen extent -30.48,-26.67 44.45,24.13
C1206 [mm] "Chip Capacitor, Body 3.2x1.6mm, IPC High Density"
  rect 1.1x1.7 smd: 1(-1.35,0) 2(1.35,0)
  silkscreen extent -0.4,-0.75 0.4,0.75, body extent -1.7,-0.9 1.7,0.9, height 1.3
CAPR5-4X5 [mm] "Capacitor; 2 Leads"
  rect 1.35x1.35 hole 0.8: 1(-2.5,0)
  round 1.35 hole 0.8: 2(2.5,0)
  silkscreen extent -1.69,-2 1.82,2
DIODE-0.7 [mm] "Diode, Thru-Hole; 2 Leads; 0.7 in Pin Spacing"
  round 1.65 hole 1: 1(-8.89,0) 2(8.89,0)
  silkscreen extent -7.37,-2.54 7.37,2.54
DO-41 [mm] "Diode, Axial; Body 5.2 x 2.7 mm (LxDia. max), Lead Dia. 0.86 mm (max)"
  round 2 hole 1.2: 1(-5.23,0)
  rect 2x2 hole 1.2: 2(5.23,0)
  silkscreen extent -2.65,-1.4 2.75,1.4
DPAK254P1420X457-3N [mm] "D2-PAK, 3-Pads, Body 7.77x8.48mm (max), IPC Medium Density"
  rect 3.504x1 smd: 1(-6.1,2.54) 3(-6.1,-2.54)
  rect 8.38x10.49 smd: 2(3.85,0)
  silkscreen extent -6.22,-5.1 -1.14,5.1, body extent -6.71,-5.13 7.48,5.13, height 4.83
DR127-4R7-R [mm] "Fixed Inductors 4.7uH 16.5A 0.0092ohms"
  rect 3.85x5.5 smd: 1(-5,0) 2(5,0)
  silkscreen extent -6.25,-6.25 6.25,6.25
"ESCON 50/8 HE" [mm]
  round 1.8 hole 1: 1(-19.05,10.16) 2(-16.51,10.16) 3(-19.05,7.62) 4(-16.51,7.62) 5(-19.05,5.08) 6(-16.51,5.08) 7(-19.05,2.54) 8(-16.51,2.54) 9(-19.05,0) 10(-16.51,0) 11(-19.05,-2.54) 12(-16.51,-2.54) 13(-19.05,-5.08) 14(-16.51,-5.08) 15(-19.05,-7.62) 16(-16.51,-7.62) 17(-19.05,-10.16) 18(-16.51,-10.16) 19(19.05,-12.7) 20(19.05,-10.16) 21(19.05,-7.62) 22(19.05,-5.08) 23(19.05,-2.54) 24(19.05,0) 25(19.05,2.54) 26(19.05,5.08) 27(19.05,7.62) 28(19.05,10.16) 29(19.05,12.7)
  silkscreen extent -26.65,-18.75 26.65,18.75
FP-SOT23-MFG [mm]
  rect 0.9x0.8 smd paste+0 mask+0: 1(-1,0.95) 2(-1,-0.95) 3(1,0)
  silkscreen extent -0.18,-1.5 0.7,1.5, body extent -1.55,-1.6 1.55,1.6, height 0.25
LTST-S220KGKT_V [mm] "SMD, 2-Leads, Body 2.15x0.6mm"
  rect 1.5x1 smd: 1(-1.25,0) 2(1.25,0)
  silkscreen extent 2.5,-0.5 2.5,0.5, body extent -1.05,-0.3 1.05,0.3, height 1.1
m3screw [mm]
  round 4.2 hole 3.2: 0(0,0)
"MOLEX 172065-0208" [mm] "Connector Header Through Hole 8 position 0.224\" (5.70mm)"
  round 2.7 hole 2: 1(9.79,-4.236) 2(4.09,-4.236) 3(-1.61,-4.236) 4(-7.31,-4.236) 5(9.79,1.439) 6(4.09,1.439) 7(-1.61,1.464) 8(-7.31,1.464)
  round 0 hole 1.9: 6(-9.79,4.236)
  silkscreen extent -10.67,-7.56 14.1,6.35, body extent -10.5,-7.54 12.96,6.49, height 15.61
"MOLEX 0039281043" [mm] "Connector Header Through Hole 4 position 0.165\" (4.20mm)"
  round 2.3 hole 1.6: 1(0,0) 2(4.2,0) 3(0,-5.5) 4(4.2,-5.5)
  silkscreen extent -4.24,-8.89 7.37,2.29, body extent -3.07,-8.82 7.33,2.18, height 12.8
"Molex Mini-Fit Jr 0039281083" [mm]
  round 2.2 hole 1.6: 1(-6.3,2.75) 2(-2.1,2.75) 3(2.1,2.75) 4(6.3,2.75) 5(-6.3,-2.75) 6(-2.1,-2.75) 7(2.1,-2.75) 8(6.3,-2.75)
  silkscreen extent -9.4,-6.1 9.4,6.1, body extent -9.4,-6.2 9.4,4.8, height 12.8
MOLEX_0039293026 [mm]
  round 2.2 hole 1.6: 1(-2.75,0) 2(2.75,0)
  silkscreen extent -4.8,-4.06 6.22,3.1, body extent -4.8,-3.1 6.2,3.1, height 12.8
MUA08A_L [mm] "TSOP, 8-Leads, Body 3x3mm, Pitch 0.65mm, IPC High Density"
  oval 1.4x0.406 smd: 1(-2.05,0.975) 2(-2.05,0.325) 3(-2.05,-0.325) 4(-2.05,-0.975) 5(2.05,-0.975) 6(2.05,-0.325) 7(2.05,0.325) 8(2.05,0.975)
  silkscreen extent -2.17,-1.55 0.95,1.87, body extent -1.55,-1.55 1.55,1.55, height 1.09
NDW0007A_V [mm] "D2-PAK, 8-Leads, Body 9.9x10.2mm, Pitch 1.27mm, Lead Span 13.8mm, TI Recommended"
  rrect11% 2.41x0.89 smd: 1(-5.35,3.81) 2(-5.35,2.54) 3(-5.35,1.27) 4(-5.35,0) 5(-5.35,-1.27) 6(-5.35,-2.54) 7(-5.35,-3.81)
  rrect2% 8.54x5.35 smd: 8(2.28,0)
  silkscreen extent -5.47,-5.15 -2.7,5.15, body extent -2.55,-5.2 7.55,5.2, height 4.67
"Panasonic EEU-FC1J221S" [mm] "Aluminum Electrolytic Capacitors - Radial Leaded 220uF 63V"
  rect 1.8x1.8 hole 1: 1(2,0)
  round 1.8 hole 1: 2(-2,0)
  silkscreen extent -6.25,-6.25 7,6.25
PLCC127P990X990X457-20N [mm] "Leaded Chip Carrier, 20-Leads, Body 9.91x9.91mm, Pitch 1.270mm, IPC Medium Density"
  oval 0.65x2.5 smd: 1(0,4.125) 2(-1.27,4.125) 3(-2.54,4.125) 9(-2.54,-4.125) 10(-1.27,-4.125) 11(0,-4.125) 12(1.27,-4.125) 13(2.54,-4.125) 19(2.54,4.125) 20(1.27,4.125)
  oval 2.5x0.65 smd: 4(-4.125,2.54) 5(-4.125,1.27) 6(-4.125,0) 7(-4.125,-1.27) 8(-4.125,-2.54) 14(4.125,-2.54) 15(4.125,-1.27) 16(4.125,0) 17(4.125,1.27) 18(4.125,2.54)
  silkscreen extent -2.48,-2.47 2.47,6.05, body extent -5.15,-5.15 5.15,5.15, height 4.57
RAD-0.3 [mm] "Radial Cap, Thru-Hole; 2 Leads; 0.3 in Pin Spacing"
  round 1.2 hole 0.7: 1(-3.81,0) 2(3.81,0)
  silkscreen extent -5.71,-1.91 5.71,1.91
"Relay RC-700112-NN" [mil]
  oval 110x450 hole 400 slot 60 at 0 deg: 30(0,-274) 85(331,100) 86(-331,100)
  oval 450x110 hole 400 slot 60 at 90 deg: 87(0,431) 87a(0,100)
  silkscreen extent -530,-605 530,530
RESC1608X06N_0603 [mm] "Chip Resistor, 2-Leads, Body 1.60x0.80mm, IPC Medium Density"
  rrect50% 0.85x0.9 smd: 1(-0.775,0) 2(0.775,0)
  silkscreen extent -0.38,-0.66 0.34,0.69, body extent -0.85,-0.45 0.85,0.45, height 0.55
RESC1609X50X30NL8T20 [mm] "Chip Resistor, 2-Leads, Body 1.65x0.95mm, IPC Medium Density"
  rect 0.8x0.95 smd: 1(-0.65,0) 2(0.65,0)
  body extent -0.82,-0.48 0.82,0.48, height 0.5
"SATA Female" [mm]
  rect 0.6x2.35 smd: 1(-15.88,1.825) 2(-14.61,1.825) 3(-13.34,1.825) 4(-12.07,1.825) 5(-10.8,1.825) 6(-9.53,1.825) 7(-8.26,1.825) 8(-6.99,1.825) 9(-5.72,1.825) 10(-4.45,1.825) 11(-3.18,1.825) 12(-1.91,1.825) 13(-0.64,1.825) 14(0.63,1.825) 15(1.9,1.825) 16(7.62,1.825) 17(8.89,1.825) 18(10.16,1.825) 19(11.43,1.825) 20(12.7,1.825) 21(13.97,1.825) 22(15.24,1.825)
  rect 0x1.5 on Top Overlay: 7(6.1,0.5)
  rect 2.6x2.6 smd: 23(-21.88,0) 24(21.88,0)
SMBJ54A-13-F [mm]
  rrect50% 2.5x2.3 smd: 1(2.15,0) 2(-2.15,0)
  body extent -2.92,-1.95 2.92,1.95, height 2.5
TSSOP50P490X110-10N [mm] "TSSOP, 10-Leads, Body 3.00x3.00mm, Pitch 0.50mm, IPC Medium Density"
  oval 1.35x0.3 smd: 1(-2.225,1) 2(-2.225,0.5) 3(-2.225,0) 4(-2.225,-0.5) 5(-2.225,-1) 6(2.225,-1) 7(2.225,-0.5) 8(2.225,0) 9(2.225,0.5) 10(2.225,1)
  silkscreen extent -2.35,-1.55 1.15,1.82, body extent -2.45,-1.55 2.45,1.55, height 1.1